# Altium PCB connector.PcbDoc
Units mil, origin at the board's own origin, x right, y up, seen from the top; angles counter-clockwise.
Board outline 4701 x 1350 mil, 2 copper layers (Top Layer, Bottom Layer); 9 components, 14 nets, 58 pads, 0 vias.
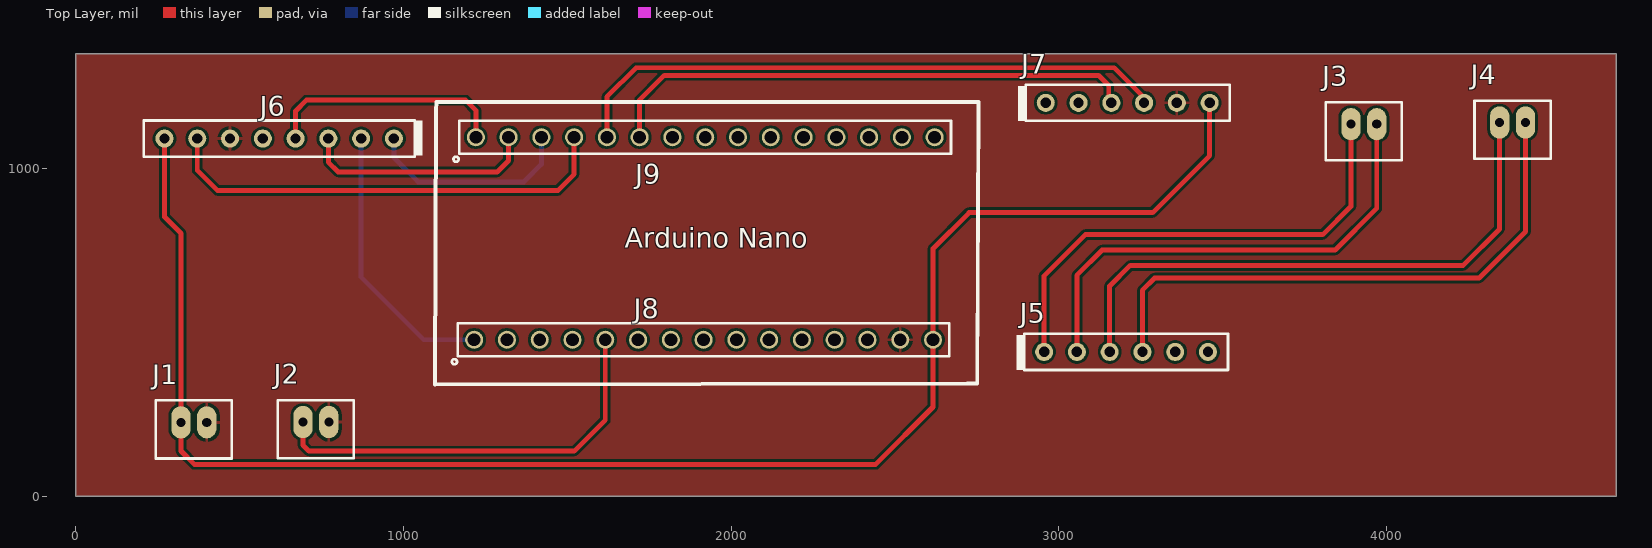
[diagram p0: Top Layer view]
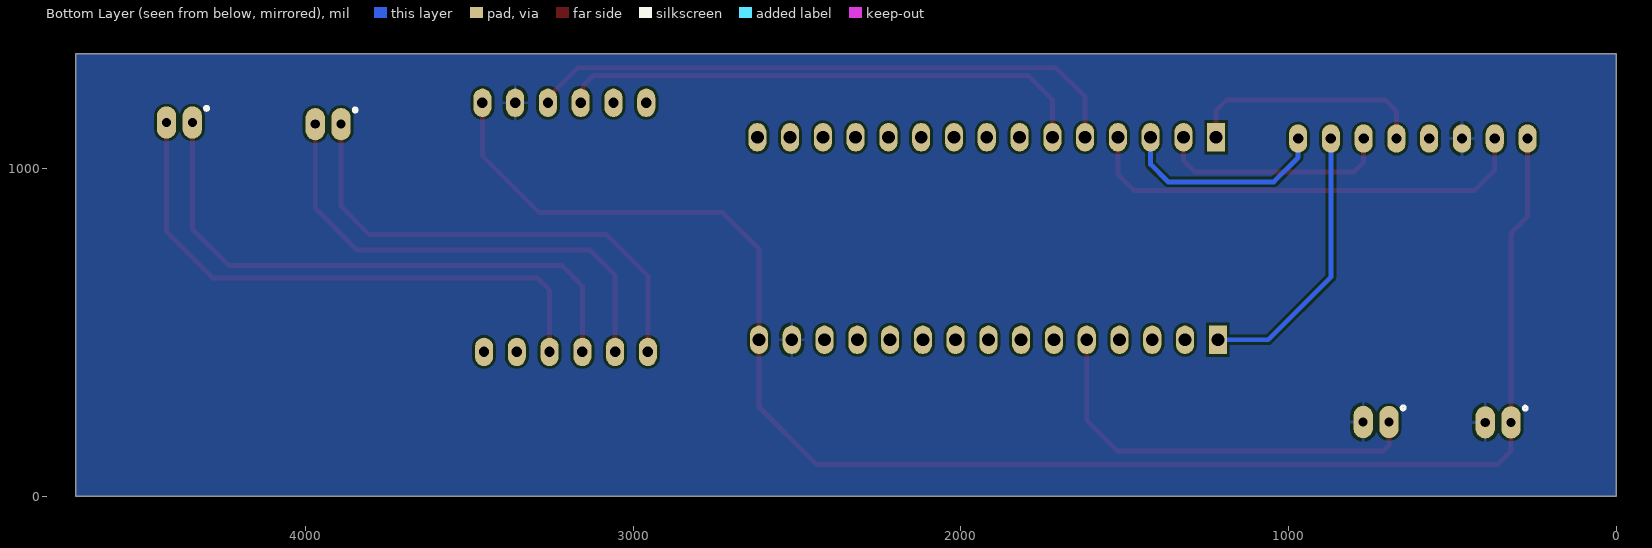
[diagram p1: Bottom Layer view, seen from below]

## Layer stack, top to bottom
Top Solder: solder mask 0.4, Solder Resist, Dk 3.5
Top Layer: signal copper 1.4
Dielectric 1: dielectric 12.6, FR-4, Dk 4.8
Bottom Layer: signal copper 1.4
Bottom Solder: solder mask 0.4, Solder Resist, Dk 3.5

## Board outline
0,0 4701,0 4701,1350 0,1350

## Design rules (kind name [scope] priority, off if disabled: settings)
Clearance [All] p1: gap=8 ignorepadtopadclearanceinfootprint=TRUE
PolygonConnect [All] p1: connectstyle=Relief reliefconductorwidth=10 reliefentries=4 polygonreliefangle="90 Angle" airgapwidth=10
RoutingVias [All] p1: holewidth=28 width=50 viastyle="Through Hole" minholewidth=28 minwidth=50 maxholewidth=28 maxwidth=50
SolderMaskExpansion [All] p1: expansion=4 istentingtop=FALSE
Width [All] p1: maxlimit=50 minlimit=10 preferedwidth=10
30 further rules are at their usual default settings.

## Classes and differential pairs
component class connector: J1 J2 J3 J4 J5 J6 J7 J8

## Components (designator, comment, footprint, x,y, rotation, side; value= is the part's Value field where it differs from the comment)
J1 "JST BxB-PH-K 2Pin" "JST B2B-PH-K" 360.63,225 r0 top
J2 "JST BxB-PH-K 2Pin" "JST B2B-PH-K" 733,226 r0 top
J3 "JST BxB-PH-K 2Pin" "JST B2B-PH-K" 3930.63,1135 r0 top
J4 "JST BxB-PH-K 2Pin" "JST B2B-PH-K" 4384.37,1140 r0 top
J5 "HDRF6" HDRLP_F_1X6 3205,440 r0 top
J6 "HDRM8" HDRLP_M_1X8 621,1091 r180 top
J7 "HDRF6" HDRLP_F_1X6 3210,1200 r0 top
J8 "HDRF15" HDR_F_1X15 1916,477 r0 top
J9 "HDRF15" HDR_F_1X15 1921,1095 r0 top

## Footprints (in the part's own frame and the unit in brackets; to place one, negate y for a bottom-side part, rotate by r counter-clockwise, add the part's x,y. Pads: shape width x height; smd on the part's side, far side on the other; paste and mask are expansions set on the pad)
HDR_F_1X15 [mm] "Connector; Header; 15 Position"
  round 1.4 / inner round 1.4 / far side rect 1.4x2.2 hole 1: 1(-17.78,0)
  round 1.4 / inner round 1.4 / far side oval 1.4x2.2 hole 1: 2(-15.24,0) 3(-12.7,0) 4(-10.16,0) 5(-7.62,0) 6(-5.08,0) 7(-2.54,0) 8(0,0) 9(2.54,0) 10(5.08,0) 11(7.62,0) 12(10.16,0) 13(12.7,0) 14(15.24,0) 15(17.78,0)
  silkscreen extent -19.51,-1.9 19.05,1.27, body extent -19.05,-1.27 19.05,1.27, height 8.5
HDRLP_F_1X6 [mm] "Connector Socket, Single-row 1-position, 0.100\" pitch"
  round 1.4 / inner round 1.4 / far side oval 1.4x2.2 hole 0.8 mask+0.1: 1(-6.35,0) 2(-3.81,0) 3(-1.27,0) 4(1.27,0) 5(3.81,0) 6(6.35,0)
  silkscreen extent -8.5,-1.4 7.9,1.4, body extent -7.81,-1.27 7.81,1.27, height 4.19
HDRLP_M_1X8 [mm] "Connector Socket, Single-row 1-position, 0.100\" pitch"
  round 1.4 / inner round 1.4 / far side oval 1.4x2.2 hole 0.8 mask+0.1: 1(-8.89,0) 2(-6.35,0) 3(-3.81,0) 4(-1.27,0) 5(1.27,0) 6(3.81,0) 7(6.35,0) 8(8.89,0)
  silkscreen extent -11.1,-1.4 10.5,1.4, body extent -10.35,-1.27 10.35,1.27, height 6.78
"JST B2B-PH-K" [mm]
  oval 1.5x2.5 hole 0.7: 1(-1,0) 2(1,0)
  silkscreen extent -2.95,-2.8 2.95,1.7, body extent -2.95,-2.8 2.95,1.7, height 6

## Part data
J1 J2 J3 J4: "Connector Header Through Hole 0.079\" (2.00mm)", PartNumber=B2B-PH-K-S(LF)(SN)
J5 J7: library part HDRLP_F_1X6, "CONN, HEADER, Male, pitch: 2.54mm, 6POS"
J6: library part HDRLP_M_1X8, "CONN, HEADER, Male, pitch: 2.54mm, 8POS"
J8 J9: library part HDR_F_1X15, "CONN, HEADER, Female, pitch: 2.54mm, 15POS"

## Nets (pads, with @x,y where several pads share a name; then routed paths per layer and width w, separated by ;. In a path a pad name is that pad's centre, name@x,y a point inside that pad or via, vN(x,y) a via of type N, cw(c..) or ccw(c..) an arc to the next point about the centre after c; other vN are vias at no path point)
+5: J1.1 J6.8 J7.6 J8.15 | length 4963.8
  Top Layer w15: J6.8 271,852 321.26,801.74 J1.1 321.26,137.74 362,97 2441,97 2616,272 J8.15 2616,755 2726,865 3286,865 3460,1039 J7.6
GND: J1.2 J2.2 J6.6 J7.5 J8.14
JST_2_PIN1: J2.1 J8.5 | length 1287
  Top Layer w15: J2.1 693.63,155.37 712,137 1521,137 1616,232 J8.5
  Bottom Layer w15: J8.5@1614,477 J8.5
NetJ3_1: J3.1 J5.1 | length 1519.6
  Top Layer w15: J5.1 2946,440 2955,449 2955,672 3081,798 3805,798 3891.26,884.26 J3.1
NetJ3_2: J3.2 J5.2 | length 1490.5
  Top Layer w15: J5.2 3055,674 3131.74,750.74 3842.74,750.74 3970,878 J3.2
NetJ4_1: J4.1 J5.3 | length 1788.1
  Top Layer w15: J5.3 3155,641 3218,704 4234,704 4345,815 J4.1
NetJ4_2: J4.2 J5.4 | length 1764
  Top Layer w15: J5.4 3255,628 3292,665 4282,665 4423.74,806.74 J4.2
NetJ6_1: J6.1 J9.3 | length 643.6
  Bottom Layer w15: J6.1 971,1033 1045,959 1368,959 1421,1012 J9.3
NetJ6_2: J6.2 J8.1 | length 847.1
  Bottom Layer w15: J6.2 871,668 1062,477 J8.1
NetJ6_3: J6.3 J9.2 | length 719.9
  Top Layer w15: J6.3 771,1019 801,989 1286,989 1321,1024 J9.2
NetJ6_4: J6.4 J9.1 | length 749.6
  Top Layer w15: J6.4 666,1091 671,1096 671,1175 704,1208 1190,1208 1221,1177 J9.1
NetJ6_7: J6.7 J9.4 | length 1409.7
  Top Layer w15: J6.7 366,1086 371,1081 371,994 432,933 1472,933 1521,982 J9.4
NetJ7_3: J7.3 J9.6 | length 1645.2
  Top Layer w15: J9.6 1721,1209 1796,1284 3121,1284 3152.32,1252.68 3152.32,1207.68 J7.3
NetJ7_4: J7.4 J9.5 | length 1852.4
  Top Layer w15: J9.5 1621,1218 1710,1307 3168.75,1307 3260,1215.75 J7.4
pads on no net: J5.5 J5.6 J6.5 J7.1 J7.2 J8.2 J8.3 J8.4 J8.6 J8.7 J8.8 J8.9 J8.10 J8.11 J8.12 J8.13 J9.7 J9.8 J9.9 J9.10 J9.11 J9.12 J9.13 J9.14 J9.15

## Polygon pours and split planes (outlines as drawn)
GND on Top Layer "GND_L01_P000" (solid, remove dead copper, pour order 0): 0,0 4701,0 4701,1350 0,1350
GND on Bottom Layer "GND_L02_P001" (solid, remove dead copper, pour order 1): 0,0 4701,0 4701,1350 0,1350

## Silkscreen, mask and mechanical layers (free items; w line width, h text height)
Top Overlay:
  lines w11.81: 1096,341 2721,344 2751,344 2755,1202 1101,1203 1100,1176 1096,341
  text "Arduino Nano" at 1675,758 h60